# EAGLE board mian (EAGLE 9.6.2)

Size 160 x 100 mm. Coordinates in mm from the lower left corner, seen from the top.
Outline: 0,0 160,0 160,100 0,100 0,0
Copper layers (1*16): Top 0.035mm / dielectric 1.5mm / Bottom 0.035mm
Design rules "default": minimum track width 6mil, minimum drill 0.35mm, track to track 6mil, track to pad 6mil, pad to pad 6mil, via to via 6mil, smd to smd 6mil, copper to edge 40mil, drill to drill 6mil, minimum pad ring 10mil, minimum via ring 8mil, stop-mask expansion 4mil, vias tented up to drill 0mil, thermal gap 10mil

## Footprints (pad centres in the part's own frame; a part is rotated, then mirrored left to right if it is on the bottom)
0805 = smd 0.8 x 1.2: 1 -0.9,0; 2 0.9,0
153CLV-0605 = smd 3.5 x 1.6: + 2.7,0; - -2.7,0
LED3MM = drill 0.813 pad 1.676 octagon: A -1.27,0; K 1.27,0
SOT23-5 = smd 0.55 x 1.2: 1 -0.95,-1.3; 2 0,-1.3; 3 0.95,-1.3; 4 0.95,1.3; 5 -0.95,1.3

## Placement (x,y rotation side)
C1  10u  [0805]  -22.86,29.21 0 top  (outside the outline)
C2  10u  [0805]  -26.67,29.21 0 top  (outside the outline)
C11  100/35  [153CLV-0605]  -17.78,6.35 0 top  (outside the outline)
C14  0.1uF  [0805]  -30.48,29.21 0 top  (outside the outline)
LED1  PW  [LED3MM]  -20.32,13.97 0 top  (outside the outline)
LED2  PW  [LED3MM]  -20.32,19.05 0 top  (outside the outline)
LED3  PW  [LED3MM]  -20.32,24.13 0 top  (outside the outline)
R1  470  [0805]  -25.4,24.13 0 top  (outside the outline)
R2  470  [0805]  -29.21,24.13 0 top  (outside the outline)
R3  2k2  [0805]  -15.24,29.21 0 top  (outside the outline)
R14  1k  [0805]  -19.05,29.21 0 top  (outside the outline)
U1  MCP73831  [SOT23-5]  -25.4,2.54 0 top  (outside the outline)

## Library data of the parts
C1 C2 C14 = SparkFun-Passives
C11 LED1-LED3 = adafruit
R1-R3 R14 = SparkFun-Resistors
U1 = SparkFun-IC-Power; PROD_ID: IC-09995

## Nets
GND: C1.2 C2.2 R1.2 R3.2 R14.2
N$1: LED1.K LED3.A U1.1
N$2: LED3.K R1.1
N$3: LED1.A R2.2
N$4: R3.1 U1.5
N$5: C1.1 U1.3
N$6: C2.1 R2.1 U1.4
N$8: C11.- C14.2
N$12: LED2.K R14.1
VCC: C11.+ C14.1 LED2.A
VSS: U1.2

## Tracks (layer width: path | path; a pad name or v marks a point on that pad's centre or on a via)
GND  (4 unrouted)
N$1  (2 unrouted)
N$2  (1 unrouted)
N$3  (1 unrouted)
N$4  (1 unrouted)
N$5  (1 unrouted)
N$6  (2 unrouted)
N$8  (1 unrouted)
N$12  (1 unrouted)
VCC  (2 unrouted)